# Altium PCB PCB2.PcbDoc
Units mm, origin at the board's own origin, x right, y up, seen from the top; angles counter-clockwise.
Board outline 152.4 x 101.6 mm, 2 copper layers (Top Layer, Bottom Layer); 22 components, 0 nets, 135 pads, 0 vias.
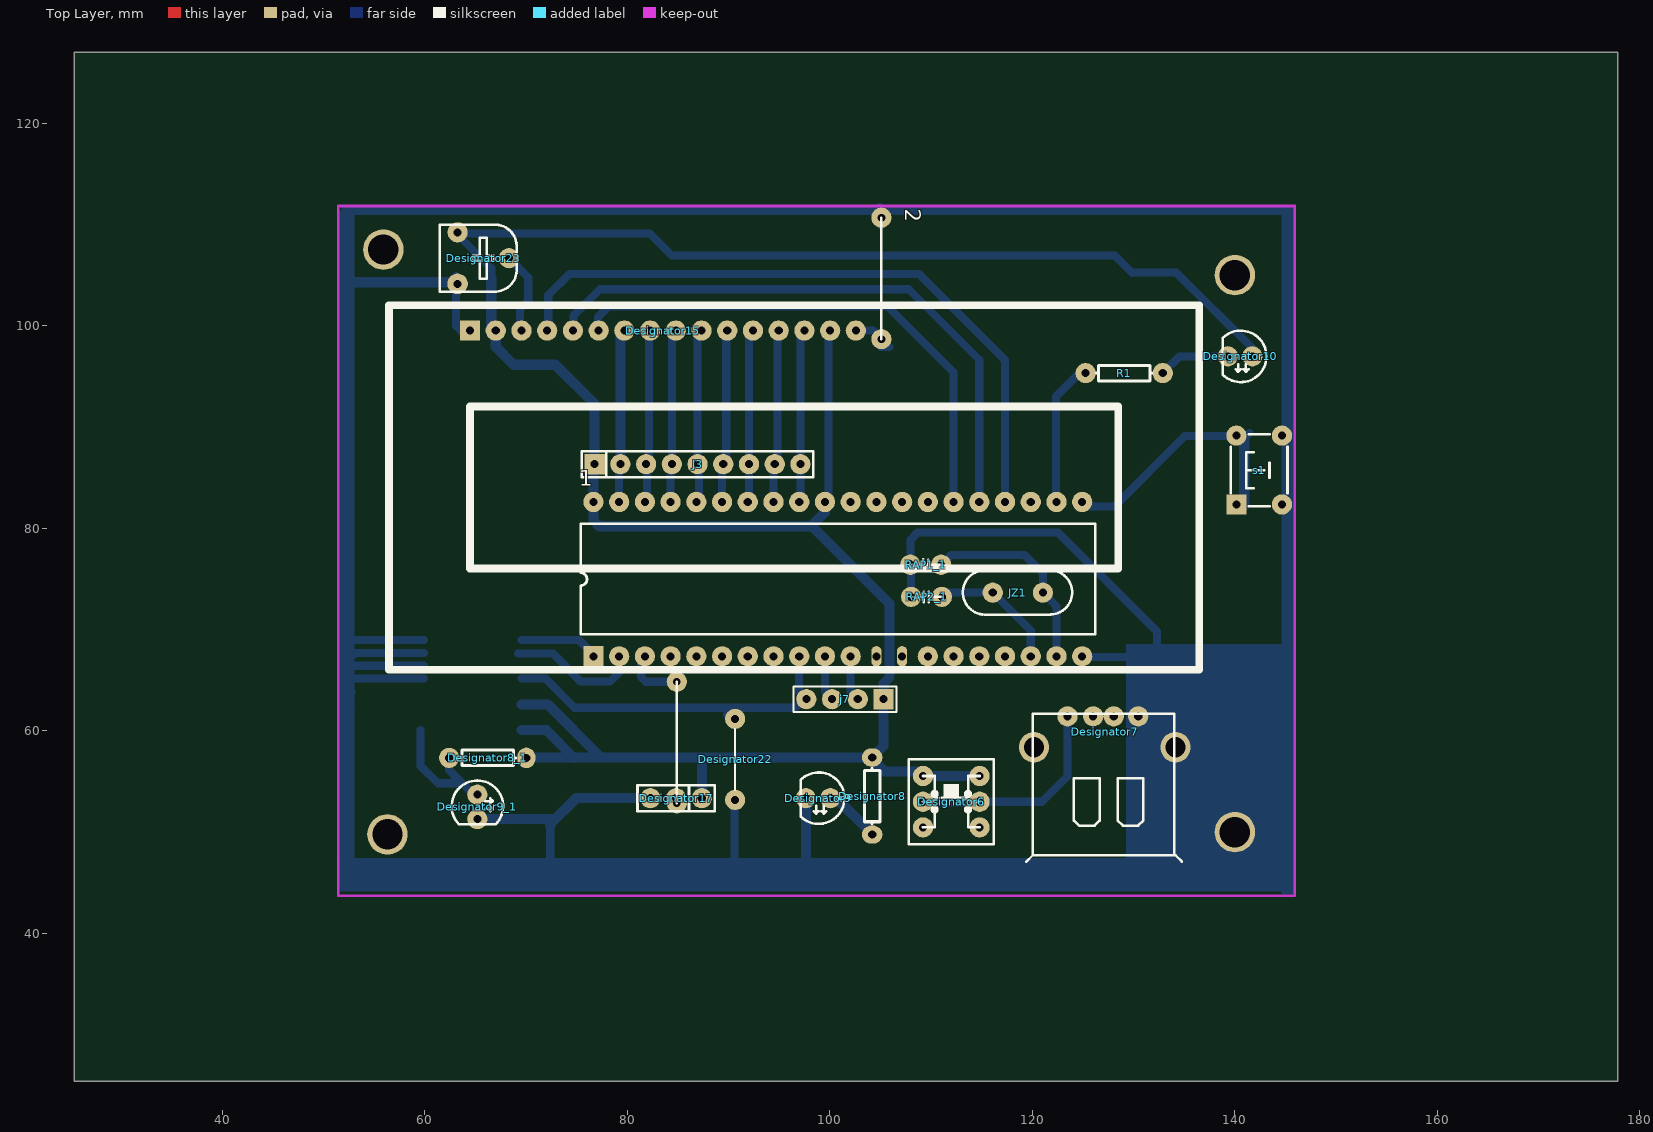
[diagram p0: Top Layer view]
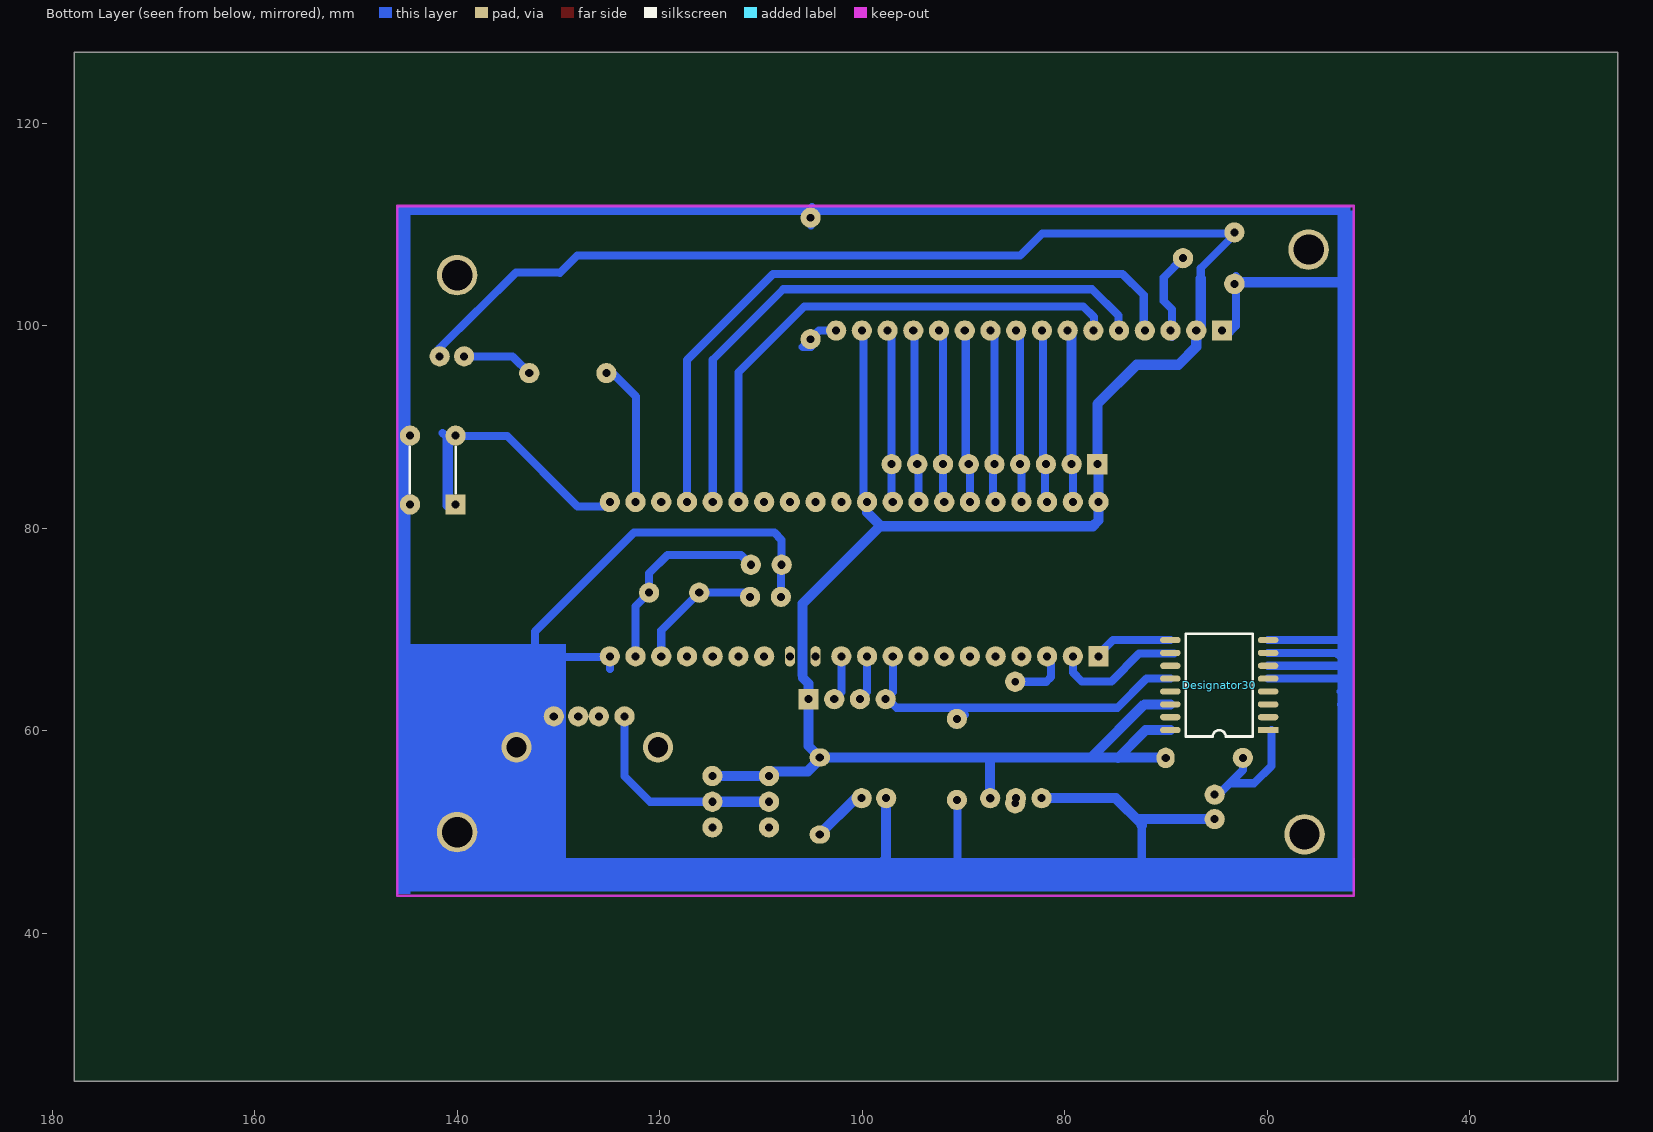
[diagram p1: Bottom Layer view, seen from below]

## Layer stack, top to bottom
Top Solder: solder mask 0.0102, Solder Resist, Dk 3.5
Top Layer: signal copper 0.0356
Dielectric1: dielectric 0.32, FR-4, Dk 4.8
Bottom Layer: signal copper 0.0356
Bottom Solder: solder mask 0.0102, Solder Resist, Dk 3.5

## Board outline
25.4,25.4 177.8,25.4 177.8,127 25.4,127

## Design rules (kind name [scope] priority, off if disabled: settings)
Clearance [All] p1: gap=0.254
FabricationTestpoint [(IsPad And (OnTopLayer Or OnBottomLayer))] p1: side=3 testpointundercomponent=TRUE minsize=1.016 maxsize=2.54 preferedsize=1.524 minholesize=0 maxholesize=1.016 preferedholesize=0.813 testpointgrid=0.025 allowsidetop=TRUE allowsidebottom=TRUE usegrid=TRUE gridtolerance=0
PolygonConnect [All] p1: connectstyle=Relief reliefconductorwidth=0.254 reliefentries=4 polygonreliefangle="90 Angle" airgapwidth=0.254
RoutingVias [All] p1: holewidth=0.711 width=1.27 viastyle="Through Hole" minholewidth=0.711 minwidth=1.27 maxholewidth=0.711 maxwidth=1.27
SolderMaskExpansion [All] p1: expansion=0.102
Width [All] p1: maxlimit=0.254 minlimit=0.254 preferedwidth=0.254
29 further rules are at their usual default settings.

## Components (designator, comment, footprint, x,y, rotation, side; value= is the part's Value field where it differs from the comment)
1 "89C52" DIP-40 98.125,74.725 r90 top
2 "Comment" 跳线 105.1,110.675 r270 top
Designator6 "Comment" AN88 112,53 r0 top
Designator7 "Comment" USB 127.225,54.175 r270 top
Designator8 "Comment" AXIAL0.3#1 104.182,53.563 r270 top
Designator8_1 "Comment" AXIAL0.3#2 66.225,57.325 r0 top
Designator9 "Comment" LED 100.05,53.35 r180 top
Designator9_1 "Comment" LED 65.2,53.7 r270 top
Designator10 "Comment" LED 141.725,96.975 r180 top
Designator15 "Comment" LCD-1602 64.475,99.525 r0 top
Designator17 "Comment" SIP3 84.825,53.35 r180 top
Designator22 "Comment" "Wire - 8mm" 90.65,57.175 r270 top
Designator23 "Comment" RM065 68.325,106.675 r270 top
Designator30 "Comment" SO-16W 59.847,59.999 r0 bottom
J3 "respack" SIP-9A 86.306,86.583 r0 top (schematic designator J1)
j7 "CON4" HDR1X4 102,63 r180 top
JZ1 "晶振" 晶振 118.525,73.7 r180 top
R1 "RES" AXIAL0.3#3 132.875,95.325 r180 top
RAP1_1 "电容" CB1 107.952,76.4 r0 top (schematic designator RAP1)
RAP2_1 "电容" CB1 108.025,73.225 r0 top (schematic designator RAP2)
s1 "0" "TSW DIP-6*6*4.3" 142.4,85.75 r90 top
? "Comment" 跳线 84.9,64.85 r270 top

## Footprints (in the part's own frame and the unit in brackets; to place one, negate y for a bottom-side part, rotate by r counter-clockwise, add the part's x,y. Pads: shape width x height; smd on the part's side, far side on the other; paste and mask are expansions set on the pad)
AN88 [mm]
  round 2 hole 0.8: 1(-2.794,2.54) 2(-2.794,0) 3(-2.794,-2.54) 4(2.794,-2.54) 5(2.794,0) 6(2.794,2.54)
  silkscreen extent -4.19,-4.19 4.19,4.19
AXIAL0.3#1 [mil]
  oval 70x80 hole 32: 1(-150,0) 2(150,0)
  silkscreen extent -109,-30 109,30
AXIAL0.3#2 [mil]
  round 78.74 hole 31.5: 1(-150,0)
  oval 70x80 hole 32: 2(150,0)
  silkscreen extent -109,-30 109,30
AXIAL0.3#3 [mil]
  round 78.74 hole 31.5: 1(0,0) 2(300,0)
  silkscreen extent 41,-30 259,30
CB1 [mm]
  round 2 hole 0.8: 1(0,0) 2(3.048,0)
  silkscreen extent 0,-0.55 3.05,0.52
DIP-40 [mm]
  rect 2x2 hole 0.8: 1(-7.366,21.463)
  round 2 hole 0.8: 2(-7.366,18.923) 3(-7.366,16.383) 4(-7.366,13.843) 5(-7.366,11.303) 6(-7.366,8.763) 7(-7.366,6.223) 8(-7.366,3.683) 9(-7.366,1.143) 10(-7.366,-1.397) 11(-7.366,-3.937) 14(-7.366,-11.557) 15(-7.366,-14.097) 16(-7.366,-16.637) 17(-7.366,-19.177) 18(-7.366,-21.717) 19(-7.366,-24.257) 20(-7.366,-26.797) 21(7.874,-26.797) 22(7.874,-24.257) 23(7.874,-21.717) 24(7.874,-19.177) 25(7.874,-16.637) 26(7.874,-14.097) 27(7.874,-11.557) 28(7.874,-9.017) 29(7.874,-6.477) 30(7.874,-3.937) 31(7.874,-1.397) 32(7.874,1.143) 33(7.874,3.683) 34(7.874,6.223) 35(7.874,8.763) 36(7.874,11.303) 37(7.874,13.843) 38(7.874,16.383) 39(7.874,18.923) 40(7.874,21.463)
  oval 2x1 hole 0.8: 12(-7.366,-6.477) 13(-7.366,-9.017)
  silkscreen extent -5.21,-28.07 5.72,22.73
HDR1X4 [mm]
  rect 2x2 hole 0.8: 1(-3.302,-0.127)
  round 2 hole 0.8: 2(-0.762,-0.127) 3(1.778,-0.127) 4(4.318,-0.127)
  silkscreen extent -4.57,-1.4 5.59,1.14
LCD-1602 [mm] "LCD module 16*2 char"
  rect 2x2 hole 0.8: 1(0,0)
  round 2 hole 0.8: 2(2.54,0) 3(5.08,0) 4(7.62,0) 5(10.16,0) 6(12.7,0) 7(15.24,0) 8(17.78,0) 9(20.32,0) 10(22.86,0) 11(25.4,0) 12(27.94,0) 13(30.48,0) 14(33.02,0) 15(35.56,0) 16(38.1,0)
  silkscreen extent -8,-33.5 72,2.5, body extent -8.15,-33.11 71.85,1.89, height 9
LED [mm]
  round 2 hole 0.8: 1(0,0) 2(2.413,0)
  silkscreen extent -1.4,-2.54 2.94,2.54
RM065 [mm] "蓝白可调电位器"
  round 2 hole 0.8: 1(-2.54,-5.08) 2(0,0)
  round 2.032 hole 0.8: 3(2.54,-5.08)
  silkscreen extent -3.3,-6.86 3.3,0.76, body extent -3.25,-6.83 3.25,0.75, height 7.6
SIP3 [mm]
  round 2 hole 0.813: 1(-2.54,0)
  round 2 hole 0.8: 2(0,0) 3(2.54,0)
  silkscreen extent -3.81,-1.27 3.81,1.27
SIP-9A [mm]
  rect 2x2 hole 0.8: 1(-9.525,-0.254)
  round 2 hole 0.8: 2(-6.985,-0.254) 3(-4.445,-0.254) 4(-1.905,-0.254) 5(0.635,-0.254) 6(3.175,-0.254) 7(5.715,-0.254) 8(8.255,-0.254) 9(10.795,-0.254)
  silkscreen extent -10.79,-1.52 12.06,1.04
SO-16W [mil]
  rect 80x24 smd: 1(3,-3)
  oval 80x24 smd: 2(3,-53) 3(3,-103) 4(3,-153) 5(3,-203) 6(3,-253) 7(3,-303) 8(3,-353) 9(383,-353) 10(383,-303) 11(383,-253) 12(383,-203) 13(383,-153) 14(383,-103) 15(383,-53) 16(383,-3)
  silkscreen extent 63,-378 323,22
"TSW DIP-6*6*4.3" [mm] "6*6*4.3mm"
  rect 2x2 hole 0.8: 1(-3.4,2.25)
  round 2 hole 0.8: 2(-3.4,-2.25) 3(3.4,-2.25) 4(3.4,2.25)
  silkscreen extent -3.56,-2.79 3.56,2.79, body extent -4.11,-3 4.11,3, height 4.25
USB [mm]
  round 2 hole 0.8: +(-7.255,-3.757) -(-7.255,3.228) D1(-7.255,0.815) D2(-7.255,-1.217)
  round 3 hole 2 unplated: VSS(-4.207,6.911) VSS2(-4.207,-7.059)
  silkscreen extent -7.51,-7.82 7.1,7.55
"Wire - 8mm" [mm] "直接：0.5mm，脚距：8mm"
  round 2 hole 0.8: 1(-4,0) 2(4,0)
  silkscreen extent -3,0 3,0, body extent -4.25,-0.25 4.25,0.25, height 0.95
晶振 [mm]
  round 2 hole 0.8: 1(-2.517,0.055) 2(2.436,0.055)
  silkscreen extent -5.41,-2.18 5.39,2.24
跳线 [mm]
  round 2 hole 0.762: 0(0,0) 0(12,0)
  silkscreen extent 0,0 12,0

## Part data
J3: library part CON9, "Connector"
j7: "Connector"
s1: library part 2位拨码开关, "DIP Switch"

## Free pads (board coordinates)
  round 4 hole 3: 0(55.925,107.525) 0(56.325,49.775) 0(140,50) 0(140,105)

## Nets (pads, with @x,y where several pads share a name; then routed paths per layer and width w, separated by ;. In a path a pad name is that pad's centre, name@x,y a point inside that pad or via, vN(x,y) a via of type N, cw(c..) or ccw(c..) an arc to the next point about the centre after c; other vN are vias at no path point)
pads on no net: 1.1 1.2 1.3 1.4 1.5 1.6 1.7 1.8 1.9 1.10 1.11 1.12 1.13 1.14 1.15 1.16 1.17 1.18 1.19 1.20 1.21 1.22 1.23 1.24 1.25 1.26 1.27 1.28 1.29 1.30 1.31 1.32 1.33 1.34 1.35 1.36 1.37 1.38 1.39 1.40 2.0 ?.0 Designator6.1 Designator6.2 Designator6.3 Designator6.4 Designator6.5 Designator6.6 Designator7.+ Designator7.- Designator7.D1 Designator7.D2 Designator7.VSS Designator7.VSS2 Designator8.1 Designator8.2 Designator8_1.1 Designator8_1.2 Designator9.1 Designator9.2 Designator9_1.1 Designator9_1.2 Designator10.1 Designator10.2 Designator15.1 Designator15.2 Designator15.3 Designator15.4 Designator15.5 Designator15.6 Designator15.7 Designator15.8 Designator15.9 Designator15.10 Designator15.11 Designator15.12 Designator15.13 Designator15.14 Designator15.15 Designator15.16 Designator17.1 Designator17.2 Designator17.3 Designator22.1 Designator22.2 Designator23.1 Designator23.2 Designator23.3 Designator30.1 Designator30.2 Designator30.3 Designator30.4 Designator30.5 Designator30.6 Designator30.7 Designator30.8 Designator30.9 Designator30.10 Designator30.11 Designator30.12 Designator30.13 Designator30.14 Designator30.15 Designator30.16 J3.1 J3.2 J3.3 J3.4 J3.5 J3.6 J3.7 J3.8 J3.9 j7.1 j7.2 j7.3 j7.4 JZ1.1 JZ1.2 R1.1 R1.2 RAP1_1.1 RAP1_1.2 RAP2_1.1 RAP2_1.2 s1.1 s1.2 s1.3 s1.4
copper on no net: | length 910.5
  Bottom Layer w0.8: 52.025,65.475 52.345,65.155 59.923,65.155 ; 52.1,61.45 52.205,61.345 ; 52.25,66.6 52.425,66.425 59.923,66.425 ; 52.45,64.225 52.79,63.885 ; 52.6,62.75 52.735,62.615 ; 52.69,68.965 59.923,68.965 ; 52.975,67.475 53.195,67.695 59.923,67.695 ; 59.6,60.075 59.6,56.525 61.3,54.825 63.55,54.825 ; 62.873,109.377 66.575,105.675 66.575,104.675 ; 63.11,104.895 63.11,99.965 64.075,99 ; 63.125,109.425 63.125,109.335 63.36,109.1 82.225,109.1 84.4,106.925 128.135,106.925 129.827,105.233 134.188,105.258 141.721,97.811 141.725,97.2 ; 65.175,53.375 62.415,56.135 ; 66.575,99.425 66.75,99.25 ; 68.325,106.675 70.225,104.775 70.225,102.45 69.4,101.625 69.4,98.9 ; 69.225,67.625 72.65,67.625 75.4,64.875 78.325,64.875 79.202,65.752 79.202,67.359 ; 69.575,65.155 71.92,65.155 74.8,62.275 96.625,62.275 97.477,63.127 ; 69.575,68.965 75.235,68.965 76.662,67.538 76.662,67.359 ; 71.65,45.525 72.4,46.275 72.4,50.65 ; 72.195,99.805 72.195,103.02 74.3,105.125 108.6,105.125 108.8,105.125 117.302,96.623 117.302,82.599 ; 74.7,99.7 74.7,101 77.3,103.6 107.725,103.6 107.8,103.6 114.762,96.638 114.762,82.599 ; 77.125,99.3 77.125,100.85 78.175,101.9 105.325,101.9 105.725,101.9 112.222,95.403 112.222,82.599 ; 79.202,82.149 79.202,86.21 ; 79.321,99.746 79.375,99.8 ; 81.35,66.967 81.35,65.325 81.825,64.85 84.9,64.85 ; 81.95,82.357 81.95,86.55 ; 82.155,86.623 82.155,99.8 ; 84.282,82.149 84.282,86.21 ; 84.401,86.329 84.401,99.506 84.695,99.8 ; 86.941,86.329 86.941,99.506 ; 87.075,82.402 87.075,86.475 ; 89.362,82.149 89.362,86.21 ; 89.775,86.623 89.775,99.8 ; 89.862,61.588 90.825,60.625 ; 90.575,46.125 90.575,53.55 ; 92.021,82.268 92.021,86.329 92.021,99.506 ; 94.442,82.149 94.442,86.21 ; 94.855,86.623 94.855,99.8 ; 96.974,67.279 96.974,63.835 97.682,63.127 ; 97.101,82.268 97.101,86.329 97.101,99.101 97.395,99.395 ; 99.514,67.279 99.514,63.835 100.222,63.127 ; 99.522,82.9 100.025,82.397 ; 99.86,82.912 99.86,99.425 ; 102.054,67.279 102.054,63.835 102.762,63.127 ; 102.575,99.525 104.25,99.525 105.875,97.9 105.05,97.9 ; 104.975,111.7 105.05,111.625 105.05,109.9 ; 108.025,73.225 108.025,76.327 107.952,76.4 107.952,78.852 108.675,79.575 122.55,79.575 132.325,69.8 132.325,68.175 132.6,67.9 ; 111,76.4 111.975,77.375 119.225,77.375 121.042,75.558 121.042,73.645 122.382,72.305 122.382,67.359 ; 111.073,73.225 111.493,73.645 116.089,73.645 119.842,69.892 119.842,67.359 ; 114.794,53 120.95,53 123.468,55.518 123.468,61.43 ; 116.517,73.583 116.517,73.72 ; 119.926,67.35 119.975,67.35 ; 122.325,82.325 122.325,93.011 124.614,95.3 ; 124.914,66.086 124.914,67.279 129.821,67.279 ; 124.922,82.149 128.099,82.149 135.05,89.1 141.125,89.1 141.45,89.425 ; 130.453,61.43 130.453,61.828 ; 132.875,95.325 134.525,96.975 139.312,96.975 ; 140.625,82.65 140.85,82.425 ; 62.415,56.135 62.415,57.325 62.415,56.135 ; 124.922,67.153 124.922,67.359 124.922,67.153
  Bottom Layer w1: 52.65,104.425 52.775,104.3 63.11,104.3 ; 65.2,51.287 72.538,51.287 72.675,51.15 ; 66.575,104.675 66.575,99.965 67.015,99.525 67.015,97.91 68.775,96.15 72.9,96.15 76.781,92.269 76.781,86.329 ; 69.575,60.075 72,60.075 74.75,57.325 ; 69.575,62.615 72.135,62.615 77.362,57.388 ; 70.083,57.373 82.442,57.373 88.227,57.373 104.182,57.373 105.302,58.493 105.302,63.127 105.302,64.677 105.85,65.225 ; 72.4,50.65 72.4,50.8 74.95,53.35 82.285,53.35 ; 76.781,86.494 76.781,86.329 ; 79.321,86.329 79.321,99.131 79.715,99.525 ; 87.365,53.35 87.365,57.19 87.375,57.2 ; 97.637,53.35 97.637,47.388 97.775,47.25 ; 99.522,82.599 99.522,81.572 98.153,80.203 ; 100.585,53.35 100.05,53.35 100.65,53.35 104.182,49.818 104,50 ; 104,57.373 105.373,56 109,56 109.46,55.54 114.794,55.54 ; 105.9,65.5 105.9,72.55 98.247,80.203 98.153,80.203 ; 109.206,53 114.794,53 ; 140.925,89.1 140.925,82.3 140.95,82.275 ; 76.781,86.329 76.662,86.21 76.662,82.599 76.662,80.763 77.222,80.203 98.153,80.203

## Keep-outs
Keep-Out Layer:
  lines w0.254: 51.475,43.725 145.925,43.725 145.925,111.825 51.475,111.825 51.475,43.725

## Other copper
Bottom Layer:
  rectangle: 51.775,110.925 145.925,111.825
  rectangle: 144.625,43.9 145.925,111.5
  rectangle: 51.325,44.125 144.775,47.45
  rectangle: 51.475,47.325 53.075,111.375
  rectangle: 129.25,46.15 145.5,68.575